# Altium PCB QUTMS_CMU_type2_v4.PcbDoc (part 2 of 2)
Units mm, origin at the board's own origin, x right, y up, seen from the top; angles counter-clockwise.
Board outline 198.55 x 64 mm, 4 copper layers (Top Layer, Signal Layer 1, Signal Layer 2, Bottom Layer), stack 0.778 mm thick; 180 components, 148 nets, 510 pads, 376 vias.
Unrouted connection lines stored in the file: 7.
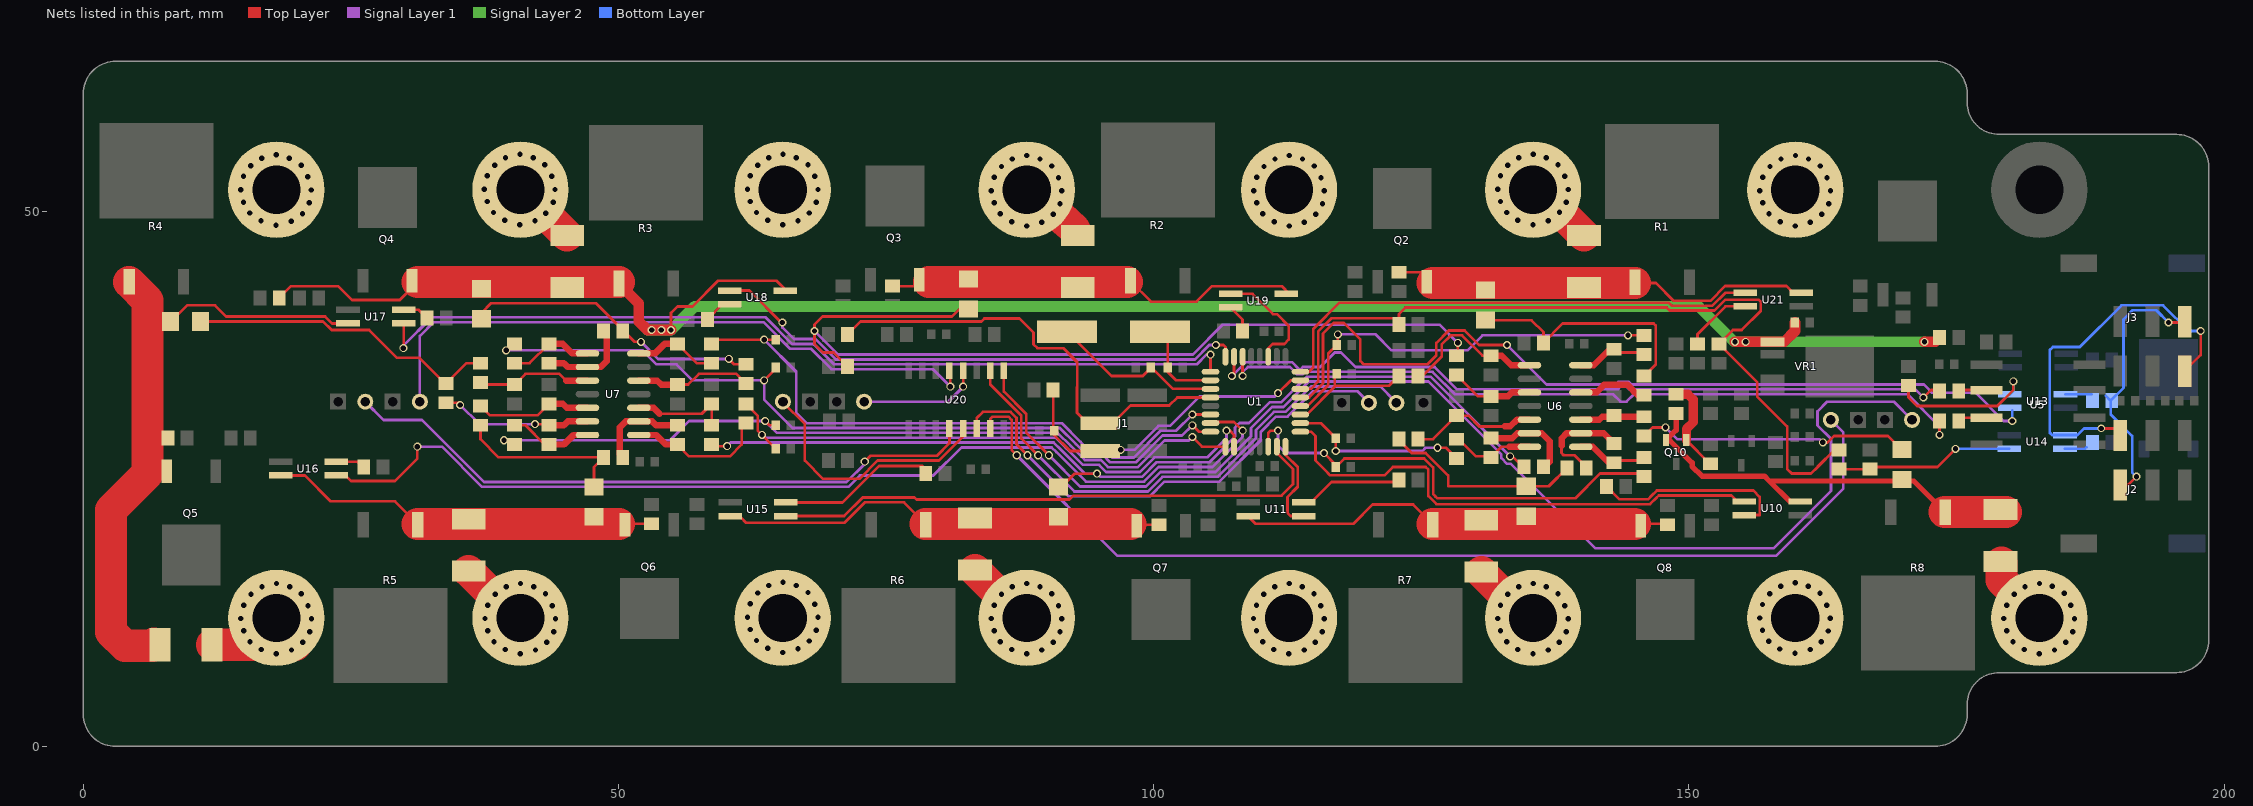
[diagram p4: the nets of this part, all layers, seen from the top]

## Via types
v1: diameter 0.8, hole 0.5, Top Layer to Bottom Layer, tented both sides, 253 vias
v2: diameter 0.75, hole 0.5, Top Layer to Bottom Layer, tented both sides, 122 vias
v3: diameter 0.7, hole 0.5, Top Layer to Bottom Layer, tented both sides, 1 vias

## Nets (pads, with @x,y where several pads share a name; then routed paths per layer and width w, separated by ;. In a path a pad name is that pad's centre, name@x,y a point inside that pad or via, vN(x,y) a via of type N, cw(c..) or ccw(c..) an arc to the next point about the centre after c; other vN are vias at no path point) (continued)
OPAMP-N4: R37.1 R46.2 U7.9 | length 8.7
  Top Layer w0.6: R37.1@43.5,35.8 44.9,35.8 45.26,35.44 U7.9@47.1,35.44 48.34,35.44 48.9,36 48.9,38.5 R46.2@48.6,38.8
OPAMP-N5: R36.1 R45.2 U7.13 | length 14.1
  Top Layer w0.254: R45.2@33.9,32.1 35,32.1 v2(35.2,31.9) ; v2(42.2,30.1) R36.1@43.4,30.1
  Top Layer w0.6: R36.1@43.5,30 44.9,30 45.26,30.36 U7.13@47.1,30.36
  Signal Layer 1 w0.254: v2(35.2,31.9) 37,30.1 v2(42.2,30.1)
OPAMP-N6: R35.1 R44.2 U7.2 | length 8.7
  Top Layer w0.6: R44.2@50.4,27 50.1,27.3 50.1,29.8 50.66,30.36 U7.2@51.9,30.36 53.14,30.36 53.5,30 R35.1@55.5,30
OPAMP-N7: R34.1 R43.2 U6.13 | length 8.7
  Top Layer w0.6: R34.1@131.51,28.79 133.49,28.79 133.96,29.26 U6.13@135.1,29.26 136.24,29.26 137,28.5 137,26.6 R43.2@136.4,26
OPAMP-N8: R33.1 R42.2 U6.2 | length 9.8
  Top Layer w0.254: 138.1,28.1 138.1,27.4 138.3,27.2 139.3,27.2 140.4,26.1 R42.2@140.4,26
  Top Layer w0.6: 138.1,28.1 138.1,28.8 138.56,29.26 139.9,29.26 142.04,29.26 R33.1@143,28.3
OPAMP-OUT1: R40.2 R77.1 U6.7 | length 6.7
  Top Layer w0.254: R40.2@143,37.1 143.3,36.8 145.6,36.8 R77.1@145.8,36.6
  Top Layer w0.6: U6.7@139.9,35.61 141.11,35.61 142.6,37.1 R40.2@143,37.1
OPAMP-OUT2: R39.2 R76.1 U6.8 | length 13.8
  Top Layer w0.254: R76.1@124.7,34.6 125.1,34.6 126.9,36.4 126.9,37.558 127.744,38.402 128.798,38.402 130.7,36.5 R39.2@131.5,36.5
  Top Layer w0.6: R39.2@131.5,36.5 132.5,36.5 133.39,35.61 U6.8@135.1,35.61
OPAMP-OUT3: R38.2 R75.1 U7.7 | length 7.9
  Top Layer w0.254: R38.2@55.5,37.6 57.3,35.8 R75.1@58.7,35.8
  Top Layer w0.6: U7.7@51.9,36.71 53.41,36.71 54.3,37.6 R38.2@55.5,37.6
OPAMP-OUT4: R37.2 R74.1 U7.8 | length 7.9
  Top Layer w0.254: R74.1@40.3,35.8 41.7,35.8 R37.2@43.5,37.6
  Top Layer w0.6: R37.2@43.5,37.6 44.8,37.6 45.69,36.71 U7.8@47.1,36.71
OPAMP-OUT5: R36.2 R73.1 U7.14 | length 7.9
  Top Layer w0.254: R73.1@40.3,30 41.3,30 43.1,28.2 R36.2@43.5,28.2
  Top Layer w0.6: R36.2@43.5,28.2 44.9,28.2 45.79,29.09 U7.14@47.1,29.09
OPAMP-OUT6: R35.2 R72.1 U7.1 | length 12.9
  Top Layer w0.254: R35.2@55.5,28.2 56.6,27.1 60.4,27.1 61.5,28.2 R72.1@61.5,30.2
  Top Layer w0.6: U7.1@51.9,29.09 53.51,29.09 54.4,28.2 R35.2@55.5,28.2
OPAMP-OUT7: R34.2 R71.1 U6.14 | length 8.1
  Top Layer w0.254: R71.1@128.3,28.9 130.1,27.1 R34.2@131.6,27.1 ; R34.2@131.5,27 R34.2@131.6,27.1 ; 133.2,27.99 132.49,27.99 R34.2@131.6,27.1
  Top Layer w0.6: 133.2,27.99 U6.14@135.1,27.99
OPAMP-OUT8: R33.2 R70.1 U6.1 | length 6.8
  Top Layer w0.254: R33.2@143,26.5 R33.2@143.3,26.8 ; R33.2@143.5,26.7 145.8,26.7 R70.1@145.6,26.8
  Top Layer w0.6: U6.1@139.9,27.99 141.01,27.99 142.7,26.3 142.8,26.3 R33.2@143,26.5
OPAMP-P1: R24.2 U6.5 | length 6.6
  Top Layer w0.6: U6.5@139.9,33.07 141.37,33.07 141.8,33.5 141.8,33.507 142.093,33.8 144.234,33.8 144.767,33.268 144.767,33.233 145.2,32.8 R24.2@145.8,32.8
OPAMP-P2: R23.2 R31.1 U6.10 | length 7.8
  Top Layer w0.254: R23.2@128.3,34.7 130.3,32.7 R31.1@131.5,32.7
  Top Layer w0.6: R31.1@131.5,32.7 133.1,32.7 133.47,33.07 U6.10@135.1,33.07
OPAMP-P3: R22.2 R30.1 U7.5 | length 10.9
  Top Layer w0.254: R30.1@55.5,33.8 56.5,33.8 57.5,34.8 61,34.8 R22.2@61.9,33.9
  Top Layer w0.6: U7.5@51.9,34.17 53.63,34.17 54,33.8 R30.1@55.5,33.8
OPAMP-P4: R21.2 R29.1 U7.10 | length 10.5
  Top Layer w0.254: R21.2@37.3,33.8 R29.1@40.3,33.8 41.3,34.8 44.47,34.8 45.1,34.17
  Top Layer w0.6: 45.1,34.17 U7.10@47.1,34.17
OPAMP-P5: R20.2 R28.1 U7.12 | length 11
  Top Layer w0.254: R20.2@37.1,31.8 37.973,30.927 42.427,30.927 R28.1@43.5,32
  Top Layer w0.6: R28.1@43.5,32 44.8,32 45.17,31.63 U7.12@47.1,31.63
OPAMP-P6: R19.2 R27.1 U7.3 | length 9.4
  Top Layer w0.254: 53.827,31.073 57.773,31.073 R27.1@58.7,32 R19.2@58.7,30
  Top Layer w0.6: U7.3@51.9,31.63 53.27,31.63 53.827,31.073
OPAMP-P7: R18.2 R26.1 U6.12 | length 12
  Top Layer w0.254: R18.2@124.7,28.7 126.1,28.7 R26.1@128.3,30.9 129.4,30.9 130.405,29.895 132.795,29.895
  Top Layer w0.6: 132.795,29.895 133.295,29.895 133.93,30.53 U6.12@135.1,30.53
OPAMP-P8: R17.2 R25.1 U6.3 | length 6
  Top Layer w0.6: U6.3@139.9,30.53 141.63,30.53 141.9,30.8 R17.2@145.8,30.8
OPTO-IN1: U1.32 U21.1 | length 47
  Top Layer w0.254: U1.32@113.7,35 114.5,35 114.9,35.4 114.9,39 117.354,41.454 148.104,41.454 148.389,41.169 152.185,41.169 153.397,42.381 U21.1@155.275,42.381
OPTO-IN2: U1.3 U19.1 | length 11
  Top Layer w0.254: U19.1@107.175,42.281 109.242,42.281 111.139,40.384 111.516,40.384 112.6,39.3 112.6,38 112.2,37.6 111.1,37.6 110.7,37.2 U1.3@110.7,36.4
OPTO-IN3: U1.8 U18.1 | length 51.6
  Top Layer w0.254: U18.1@59.481,42.581 U18.1@60.375,42.581 62.219,42.581 v2@65.2,39.6 ; v2(105.8,37.5) 106.5,37.5 106.7,37.3 U1.8@106.7,36.4
  Signal Layer 1 w0.254: v2(65.3,39.6) 65.3,39.142 66.388,38.055 68.373,38.055 68.453,37.975 68.483,37.975 70.304,36.154 103.838,36.154 105.184,37.5 v2(105.8,37.5)
OPTO-IN4: U1.9 U17.1 | length 82.8
  Top Layer w0.254: v2@29.925,37.225 U17.1@29.925,39.519 ; U1.9@105.3,35 v2(105.3,36.6)
  Signal Layer 1 w0.254: v2(29.9,37.2) 29.9,37.442 32.548,40.09 63.71,40.09 66.199,37.601 68.185,37.601 68.265,37.521 68.295,37.521 70.116,35.7 104.026,35.7 104.926,36.6 v2(105.3,36.6)
OPTO-IN5: U1.15 U16.1 | length 96.9
  Top Layer w0.254: U16.1@23.625,25.319 24.481,25.319 25,24.8 29.1,24.8 31.2,26.9 v2(31.2,28) ; U1.15@105.3,30.3 107.5,30.3 v2(108.3,29.5)
  Signal Layer 1 w0.254: v2(31.2,28) 33.5,28 37.254,24.246 71.488,24.246 72.542,25.3 79.4,25.3 82.03,27.93 90.463,27.93 90.902,27.491 90.902,27.488 93.662,24.728 99.08,24.728 100.444,26.092 105.492,26.092 108.3,28.9 v2(108.3,29.5)
OPTO-IN6: U1.23 U15.1 | length 53.7
  Top Layer w0.254: U15.1@64.781,21.519 U15.1@65.625,21.519 71.077,21.519 72.812,23.254 77.646,23.254 77.827,23.073 92.135,23.073 92.489,23.427 111.927,23.427 113,24.5 113,25.899 111.5,27.399 U1.23@111.5,28
OPTO-IN7: U1.24 U11.1 | length 8.7
  Top Layer w0.254: U1.24@112.3,28 112.3,27.241 113.454,26.087 113.454,24.254 112.5,23.3 112.5,21.8 112.781,21.519 U11.1@114.025,21.519
OPTO-IN8: U1.25 U10.1 | length 48.3
  Top Layer w0.254: U1.25@113.7,29.4 114.7,29.4 115.1,29 115.1,26.7 116.273,25.527 116.273,25.515 116.465,25.323 121.561,25.323 122.338,26.1 125.4,26.1 125.646,25.854 125.646,23.386 ; 125.646,23.375 126.393,22.627 146.369,22.627 146.973,23.231 146.973,23.235 147.184,23.446 153.954,23.446 154.519,22.881 U10.1@155.175,22.881
OPTO-OUT1: R9.2 U21.2 | length 6.5
  Top Layer w0.254: R9.2@150.8,37.6 150.8,38.5 153.411,41.111 U21.2@155.275,41.111
OPTO-OUT2: R10.2 U19.2 | length 2.7
  Top Layer w0.254: U19.2@107.175,41.011 108.3,39.886 R10.2@108.3,38.8
OPTO-OUT3: R11.2 U18.2 | length 2
  Top Layer w0.254: R11.2@58.3,39.9 U18.2@59.711,41.311
OPTO-OUT4: R12.2 U17.2 | length 2.5
  Top Layer w0.254: U17.2@29.925,40.789 31.311,40.789 R12.2@32.1,40
OPTO-OUT5: R13.2 U16.2 | length 2.8
  Top Layer w0.254: U16.2@23.625,26.589 25.611,26.589 R13.2@26.2,26
OPTO-OUT6: R14.2 U15.2 | length 14.6
  Top Layer w0.254: U15.2@65.625,22.789 70.931,22.789 74.342,26.2 78.4,26.2 R14.2@78.7,25.9
OPTO-OUT7: R15.2 U11.2 | length 9.7
  Top Layer w0.254: U11.2@114.025,22.789 114.689,22.789 116.6,24.7 122.7,24.7 R15.2@122.9,24.9
OPTO-OUT8: R16.2 U10.2 | length 18.5
  Top Layer w0.254: R16.2@142.3,24.3 143.519,23.081 146.181,23.081 146.519,23.419 146.519,23.423 146.996,23.9 156.018,23.9 156.602,23.316 156.602,21.613 ; U10.2@155.175,21.611 156.602,21.611
P_GATE: Q10.1 R96.2 R97.2 | length 9
  Top Layer w0.254: Q10.1@149.75,28.6 151.95,26.4 R97.2@152,26.4
  Top Layer w0.85: R96.2@148.8,32.9 149.9,32.9 150.4,32.4 150.4,30.3 149.75,29.65 Q10.1@149.75,28.6
PSEG_1: F1.2 F9.1 Q2.3 R1.1 R49.1 U21.4 | length 39.5
  Top Layer w0.254: R49.1@122.9,44.3 125.06,44.3 126.065,43.295 ; R1.1@144.96,43.3 146.9,43.3 148.577,41.623 151.997,41.623 153.382,43.008 159.092,43.008 159.719,42.381 U21.4@160.475,42.381
  Top Layer w3: 126.065,43.295 R1.1@144.955,43.295
PSEG_2: F2.2 F10.1 Q3.3 R2.1 R32.1 U19.4 | length 38.3
  Top Layer w0.254: R32.1@75.6,43 78.245,43 78.69,43.445 ; R2.1@97.835,43.445 99.734,41.546 104.005,41.546 105.458,43 111.956,43 U19.4@112.675,42.281
  Top Layer w3: 79,43.4 R2.1@97.49,43.4
PSEG_3: C99.2 F3.2 F11.1 Q4.3 R3.1 R58.2 R60.2 U18.4 VR1.1 | length 185
  Top Layer w0.254: R58.2@18.3,41.9 19.4,43 23.8,43 25.107,41.693 29.563,41.693 31.24,43.37 ; v2(54.9,38.9) 54.9,40.5 55.5,41.1 56.9,41.1 59.3,43.5 64.762,43.5 U18.4@65.681,42.581
  Top Layer w1: R3.1@50.035,43.245 51.9,41.38 51.9,39.7 52.7,38.9 v2(54.9,38.9) ; v2(154.3,37.8) v2(155.3,37.8) 158.9,37.8 159.9,38.8 C99.2@159.9,39.6 ; v2(172,37.8) 173,37.8 R60.2@173.4,38.2
  Top Layer w3: 31.24,43.37 43.53,43.37 R3.1@50.035,43.37
  Signal Layer 2 w1: 52.7,38.9 v2(54.9,38.9) 57.1,41.1 150.9,41.1 154.2,37.8 v2(154.3,37.8) v2(155.3,37.8) v2(172,37.8)
  other v2: 53.1,38.9 54,38.9
PSEG_4: F4.2 F12.1 Q5.3 R4.1 R59.1 U17.4 | length 57.3
  Top Layer w0.254: F4.2@8.2,39.7 9.7,41.2 12.3,41.2 13.346,40.154 22.588,40.154 23.242,39.5 U17.4@24.744,39.5
  Top Layer w3: R4.1@4.285,43.37 6,41.655 6,25.5 2.6,22.1 2.6,10.7 3.9,9.4 6.4,9.4 F12.1@6.6,9.6
PSEG_5: F5.2 F13.1 Q6.3 R5.1 R83.1 U16.4 | length 37.1
  Top Layer w0.254: U16.4@17.925,25.3 20.7,25.3 23.1,22.9 23.092,22.892 29.118,22.892 R5.1@31.24,20.77 ; 50.035,20.77 50.065,20.8 R83.1@53.1,20.8
  Top Layer w3: R5.1@31.24,20.77 50.035,20.77
PSEG_6: F6.2 F14.1 Q7.3 R6.1 R84.1 U15.4 | length 41.3
  Top Layer w0.254: U15.4@61.025,21.419 61.381,21.419 61.908,20.892 71.092,20.892 73,22.8 76.66,22.8 R6.1@78.69,20.77 ; Q7.3@97.905,20.7 R84.1@100.5,20.7
  Top Layer w3: R6.1@78.69,20.77 97.835,20.77
PSEG_7: F7.2 F15.1 Q8.3 R7.1 R85.1 U11.4 | length 41
  Top Layer w0.254: U11.4@108.803,21.497 109.5,20.8 118.653,20.8 120.453,22.6 124.235,22.6 R7.1@126.065,20.77 ; 144.935,20.8 R85.1@148,20.8
  Top Layer w3: R7.1@126.065,20.77 144.935,20.77
PSEG_8: F8.2 F16.1 Q10.2 R8.1 R96.1 U10.4 | length 41.3
  Top Layer w0.5: R96.1@148.8,31.1 148.8,29.55 147.85,28.6 148.189,28.6 150.3,26.489 150.3,26.164 151.214,25.25 157.05,25.25 157.5,24.8 ; U10.4@160.375,22.881 159.419,22.881 157.5,24.8 ; R8.1@173.896,21.904 171,24.8 157.5,24.8
  Top Layer w3: R8.1@173.896,21.904 179.099,21.904 F16.1@179.6,21.902
PTRACE1: F1.1 R24.1 R48.1 | length 23.3
  Top Layer w0.254: F1.1@131,39.8 135.3,39.8 136.4,38.7 R48.1@136.4,37.7 138.2,39.5 146.7,39.5 146.9,39.3 146.9,35.7 R24.1@145.8,34.6
PTRACE2: F2.1 R23.1 R47.1 | length 84.8
  Top Layer w0.254: R47.1@71.4,35.5 70.1,36.8 69.1,36.8 68.3,37.6 68.3,39.4 69.054,40.154 81.154,40.154 81.85,40.85 F2.1@82.7,40.85 ; R23.1@128.2,36.6 128.4,36.8 v2(128.4,37.7)
  Signal Layer 1 w0.254: v2(68.3,38.8) 70.492,36.608 103.65,36.608 106.442,39.4 126.7,39.4 v2(128.4,37.7)
PTRACE3: F3.1 R22.1 R46.1 | length 27.4
  Top Layer w0.254: F3.1@37.2,40.5 38.1,41.4 47.9,41.4 51.5,37.8 v2(52.1,37.8) ; v2(60.3,36.2) 60.8,35.7 R22.1@61.9,35.7
  Signal Layer 1 w0.254: v2(52.1,37.8) 53.7,36.2 v2(60.3,36.2)
PTRACE4: F4.1 R21.1 R45.1 | length 28.9
  Top Layer w0.254: F4.1@11,39.7 22.4,39.7 23.208,38.892 26.708,38.892 29.3,36.3 31.4,36.3 R45.1@33.6,34.1 ; R45.1@33.9,33.9 35.8,35.8 R21.1@37.1,35.8
PTRACE5: F5.1 R20.1 R44.1 | length 16.9
  Top Layer w0.254: R20.1@37.1,30 37.1,28.7 38.8,27 R44.1@48.6,27 47.7,26.1 47.7,24.3 F5.1@47.9,24.1
PTRACE6: F6.1 R19.1 R43.1 | length 89.3
  Top Layer w0.254: R19.1@58.854,28.046 v2(60.146,28.046) ; F6.1@91.1,24.2 91.336,24.2 92.618,25.482 v2(94.703,25.482) ; v2(133.3,27.1) 133.5,27.1 R43.1@134.6,26
  Signal Layer 1 w0.254: v2(60.146,28.046) 60.484,28.384 90.651,28.384 91.356,27.679 91.356,27.676 93.55,25.482 94.718,25.482 95.018,25.182 98.892,25.182 100.256,26.546 105.188,26.546 107.598,28.956 107.598,29.791 108.009,30.202 108.902,30.202 110.862,32.162 111.92,32.162 114.058,34.3 114.066,34.3 114.305,34.539 125.861,34.539 v2(133.3,27.1)
PTRACE7: F7.1 R18.1 R42.1 | length 19.1
  Top Layer w0.254: R18.1@122.9,28.6 124.1,27.4 125.4,27.4 127.5,25.3 127.5,24.3 136.9,24.3 R42.1@138.6,26 ; R18.1@122.9,28.9 R18.1@122.9,29.2
PTRACE8: F8.1 R17.1 | length 25.8
  Top Layer w0.254: R17.1@145.8,29 146.6,29.8 v2(147.8,29.8) ; v2(162.5,28.4) 162.938,28.4 163.538,29 168.6,29 F8.1@169.9,27.7
  Signal Layer 1 w0.254: v2@147.8,29.798 148.898,28.7 162.2,28.7 v2(162.5,28.4)
RESET: C22.2 J1.5 R98.1 U1.31 | length 28.7
  Top Layer w0.254: R98.1@90.6,33.3 90.6,29.2 92.2,27.6 J1.5@95,27.6 ; v2(111.6,33) 112.8,34.2 U1.31@113.7,34.2
  Signal Layer 1 w0.254: v2(96.9,27.7) 98.2,27.7 100.444,29.944 101.528,29.944 104.276,32.692 111.292,32.692 v2(111.6,33)
RX_CAN1: R66.2 U1.7 | length 71.6
  Top Layer w0.254: v2(107.3,34.6) 107.5,34.8 U1.7@107.5,36.4 ; v2(171.9,32.6) 172.6,33.3 R66.2@173.3,33.3
  Signal Layer 1 w0.254: v2(107.3,34.6) 108.6,35.9 112.9,35.9 113.592,35.208 113.69,35.208 113.929,35.447 115.554,35.447 116.909,36.802 117.491,36.802 118.846,35.447 126.237,35.447 128.33,33.354 143.348,33.354 143.601,33.607 144.182,33.607 144.436,33.354 171.146,33.354 v2(171.9,32.6)
RX_CAN2: R66.1 U5.2 | length 2.7
  Top Layer w0.254: R66.1@175.1,33.3 U5.2@177.755,33.3
SCK: J1.3 R80.1 U1.12 | length 42.1
  Top Layer w0.254: R80.1@71.4,38.5 72.6,39.7 83.895,39.7 84.177,39.981 87.461,39.981 88.773,38.669 88.773,37.565 89.138,37.2 91.542,37.2 92.854,35.888 92.854,33.591 92.833,33.57 92.833,31.167 93.8,30.2 J1.3@95,30.2 ; J1.3@95.962,29.962 97.838,31.838 101.438,31.838 102.2,32.6 U1.12@105.3,32.6
SEG_1: F9.2 pad.@135.435,52 pad.@159.935,52 | length 6
  Top Layer w3: pad.@135.925,52 F9.2@140.2,47.725
  other v1: 159.925,48.62 135.425,48.745 161.345,48.975 158.52,49.025 136.845,49.1 134.02,49.15 162.395,49.7 157.47,49.75 132.97,49.875 137.9,49.9 163.045,50.7 156.895,50.775 138.545,50.825 132.395,50.9 163.214,51.903 156.62,51.925 138.714,52.028 132.12,52.05 162.895,53.125 156.895,53.175 138.395,53.25 132.395,53.3 157.57,54.175 162.27,54.225 133.07,54.3 137.77,54.35 158.595,54.875 161.17,54.875 134.095,55 136.67,55 159.945,55.2 135.445,55.325
SEG_2: F10.2 pad.@88.135,52 pad.@112.635,52 | length 10.9
  Top Layer w3: pad.@88.625,52 92.6,48.3 90.598,50.027 90.585,50.04 pad.@88.625,52
  other v1: 88.125,48.62 112.65,48.62 89.545,48.975 114.07,48.975 86.72,49.025 111.245,49.025 90.62,49.7 115.12,49.7 85.67,49.75 110.195,49.75 91.245,50.7 115.77,50.7 85.095,50.775 109.62,50.775 91.414,51.903 115.939,51.903 84.82,51.925 109.345,51.925 91.095,53.125 115.62,53.125 85.095,53.175 109.62,53.175 85.77,54.175 110.295,54.175 90.47,54.225 114.995,54.225 86.795,54.875 89.37,54.875 111.32,54.875 113.895,54.875 88.145,55.2 112.67,55.2
SEG_3: F11.2 pad.@40.835,52 pad.@65.335,52 | length 6
  Top Layer w3: pad.@40.925,52 F11.2@45.2,47.725
  other v1: 40.775,48.745 65.35,48.745 42.195,49.1 66.77,49.1 39.37,49.15 63.945,49.15 43.2,49.8 67.82,49.825 38.32,49.875 62.895,49.875 43.895,50.825 68.47,50.825 37.745,50.9 62.32,50.9 44.064,52.028 68.639,52.028 37.47,52.05 62.045,52.05 43.745,53.25 68.32,53.25 37.745,53.3 62.32,53.3 38.42,54.3 62.995,54.3 43.12,54.35 67.695,54.35 39.445,55 42.02,55 64.02,55 66.595,55 40.795,55.325 65.37,55.325
SEG_4: F12.2 pad.@18.035,12 pad.@18.035,52 | length 11.3
  Top Layer w3: F12.2@12.025,9.5 19.8,9.5 pad.@17.3,12
  other v1: 18.025,8.645 19.445,9 16.62,9.05 20.495,9.725 15.57,9.775 21.145,10.725 14.995,10.8 21.314,11.928 14.72,11.95 20.995,13.15 14.995,13.2 15.67,14.2 20.37,14.25 16.695,14.9 19.27,14.9 18.045,15.225 18,48.695 19.42,49.05 16.595,49.1 20.47,49.775 15.545,49.825 21.12,50.775 14.97,50.85 21.289,51.978 14.695,52 20.97,53.2 14.97,53.25 15.645,54.25 20.345,54.3 16.67,54.95 19.245,54.95 18.02,55.275
SEG_5: F13.2 pad.@40.835,12 pad.@65.335,12 | length 6.2
  Top Layer w3: F13.2@36,16.375 pad.@40.375,12
  other v1: 40.825,8.645 65.35,8.77 42.245,9 39.42,9.05 66.77,9.125 63.945,9.175 43.295,9.725 38.37,9.775 67.82,9.85 62.895,9.9 43.945,10.725 37.795,10.8 68.47,10.85 62.32,10.925 44.114,11.928 37.52,11.95 68.639,12.053 62.045,12.075 43.795,13.15 37.795,13.2 68.32,13.275 62.32,13.325 38.47,14.2 43.17,14.25 62.995,14.325 67.695,14.375 39.495,14.9 42.07,14.9 64.02,15.025 66.595,15.025 40.845,15.225 65.37,15.35
SEG_6: F14.2 pad.@88.135,12 pad.@112.635,12 | length 6.3
  Top Layer w3: F14.2@83.3,16.475 pad.@87.775,12
  other v1: 88.125,8.645 112.625,8.645 89.545,9 114.045,9 86.72,9.05 111.22,9.05 90.595,9.725 115.095,9.725 85.67,9.775 110.17,9.775 91.245,10.725 115.745,10.725 85.095,10.8 109.595,10.8 91.414,11.928 115.914,11.928 84.82,11.95 109.32,11.95 91.095,13.15 115.595,13.15 85.095,13.2 109.595,13.2 85.77,14.2 110.27,14.2 90.47,14.25 114.97,14.25 86.795,14.9 89.37,14.9 111.295,14.9 113.87,14.9 88.145,15.225 112.645,15.225
SEG_7: F15.2 pad.@135.435,12 pad.@159.935,12 | length 6.8
  Top Layer w3: F15.2@130.6,16.275 pad.@135.435,11.44
  other v1: 135.425,8.645 159.9,8.695 136.845,9 134.02,9.05 161.32,9.05 158.495,9.1 137.895,9.725 132.97,9.775 162.37,9.775 157.445,9.825 138.545,10.725 163.02,10.775 132.395,10.8 156.87,10.85 138.714,11.928 132.12,11.95 163.189,11.978 156.595,12 138.395,13.15 132.395,13.2 162.87,13.2 156.87,13.25 133.07,14.2 137.77,14.25 157.545,14.25 162.245,14.3 134.095,14.9 136.67,14.9 158.57,14.95 161.145,14.95 135.445,15.225 159.92,15.275
SEG_8: F16.2 pad.@182.735,12 | length 6.6
  Top Layer w3: F16.2@179.2,17.175 179.2,15.535 pad.@182.735,12
  other v1: 182.725,8.645 184.145,9 181.32,9.05 185.195,9.725 180.27,9.775 185.845,10.725 179.695,10.8 186.014,11.928 179.42,11.95 179.695,13.2 185.67,13.2 180.37,14.2 185.045,14.3 181.395,14.9 183.945,14.95 182.745,15.225
TH1: TH1.2 U20.1 | length 115.2
  Top Layer w0.254: U20.1@85.994,35.1 85.994,33.164 88.083,31.075 88.083,29.317 v2(90.2,27.2)
  Signal Layer 1 w0.254: v2(90.2,27.2) 93.126,24.274 99.268,24.274 100.632,25.638 105.754,25.638 109.09,28.974 109.09,29.748 111.05,31.708 112.108,31.708 114.246,33.846 114.254,33.846 114.493,34.085 125.673,34.085 132.475,27.283 132.475,26.933 133.009,26.398 133.36,26.398 141.258,18.5 157.9,18.5 163.26,23.86 163.26,28.74 162.002,29.998 162.002,31.302 162.9,32.2 169.14,32.2 TH1.2@170.84,30.5
TH2: TH2.2 U20.2 | length 50
  Top Layer w0.254: U20.2@84.724,35.1 84.724,33.792 87.629,30.887 87.629,28.771 v2(89.2,27.2)
  Signal Layer 1 w0.254: v2(89.2,27.2) 92.58,23.82 99.456,23.82 100.82,25.184 105.942,25.184 109.544,28.786 109.544,29.56 111.238,31.254 112.304,31.254 114.681,33.631 121.169,33.631 122.46,32.34 TH2.2@122.46,31.8
TH3: TH3.2 U20.4 | length 11.3
  Top Layer w0.254: v2(82.2,33.6) U20.4@82.2,35.1
  Signal Layer 1 w0.254: TH3.2@72.94,32.2 72.942,32.202 78.591,32.202 78.593,32.2 80.8,32.2 v2(82.2,33.6)
TH4: TH4.2 U20.5 | length 60.2
  Top Layer w0.254: v2(81,33.6) U20.5@81,35.014
  Signal Layer 1 w0.254: TH4.2@31.44,32.2 31.44,38.34 32.736,39.636 63.522,39.636 66.011,37.147 67.997,37.147 69.897,35.246 79.354,35.246 v2(81,33.6)
TH5: TH5.2 U20.12 | length 60.7
  Top Layer w0.254: v2(73,26.6) 73.554,27.154 79.737,27.154 80.914,28.331 U20.12@80.914,29.7
  Signal Layer 1 w0.254: TH5.2@26.34,32.2 28.04,30.5 31.642,30.5 37.442,24.7 71.3,24.7 73,26.4 v2(73,26.6)
TH6: TH6.2 U20.13 | length 24.2
  Top Layer w0.254: TH6.2@65.36,32.14 67.4,30.1 67.4,26.7 69.1,25 72.5,25 74.2,26.7 79.925,26.7 82.184,28.959 U20.13@82.184,29.7
TH7: TH7.2 U20.14 | length 47.7
  Top Layer w0.254: U20.14@83.454,29.7 83.454,30.654 84.056,31.256 86.617,31.256 87.175,30.698 87.175,28.225 v2(88.2,27.2)
  Signal Layer 1 w0.254: v2(88.2,27.2) 92.034,23.366 99.644,23.366 101.008,24.73 106.13,24.73 109.998,28.598 109.998,29.372 111.426,30.8 112.492,30.8 114.869,33.177 119.023,33.177 119.9,32.3 TH7.2@119.9,31.8
TH8: TH8.2 U20.15 | length 97.2
  Top Layer w0.254: U20.15@84.724,29.7 84.724,30.574 84.952,30.802 86.429,30.802 86.721,30.51 86.721,27.679 v2(87.2,27.2)
  Signal Layer 1 w0.254: v2(87.2,27.2) 96.6,17.8 158.14,17.8 164.4,24.06 164.4,29.36 TH8.2@163.26,30.5
TX_CAN1: R65.2 U1.6 | length 72.9
  Top Layer w0.254: v2(108.3,34.6) U1.6@108.3,36.4 ; v2(173.4,29.1) R65.2@173.4,30.7
  Signal Layer 1 w0.254: v2(108.3,34.6) 108.3,34.958 108.788,35.446 112.712,35.446 113.404,34.754 113.878,34.754 114.117,34.993 126.049,34.993 128.142,32.9 142.904,32.9 143.601,32.203 144.182,32.203 144.879,32.9 170.4,32.9 173.4,29.9 v2(173.4,29.1)
TX_CAN2: R65.1 U5.3 | length 2.6
  Top Layer w0.254: R65.1@175.2,30.7 U5.3@177.785,30.7
VSENSE1: C8.2 R77.2 U1.28 | length 38.2
  Top Layer w0.254: U1.28@113.7,31.8 114.358,31.8 116.3,33.742 116.3,36.7 C8.2@117.1,37.5 ; C8.2@117.2,37.6 v2(117.2,38.5) ; v2(144.3,38.4) R77.2@145.8,38.4
  Signal Layer 1 w0.254: v2(117.2,38.5) 120.7,38.5 122.202,36.998 129.298,36.998 130.7,38.4 v2(144.3,38.4)
VSENSE2: C7.2 R76.2 U1.27 | length 11.9
  Top Layer w0.254: U1.27@113.7,31 114.301,31 116.9,33.599 116.9,34.6 C7.2@117.1,34.8 ; 116.9,33.7 122,33.7 R76.2@122.9,34.6
VSENSE3: C6.2 R75.2 U1.14 | length 56.2
  Top Layer w0.254: R75.2@58.7,37.6 59.1,38 C6.2@64.7,38 ; v2@103.7,31 U1.14@105.3,31
  Signal Layer 1 w0.254: v2(63.6,38) 66.6,35 66.6,31.162 67.562,30.2 91.403,30.2 93.172,28.431 93.172,28.428 93.936,27.664 95.44,27.664 96.106,26.998 98.14,26.998 100.632,29.49 102.09,29.49 v2(103.6,31)
VSENSE4: C5.2 R74.2 U1.16 | length 74.5
  Top Layer w0.254: v2(63.6,34.2) 64.7,35.3 C5.2@64.7,35.4 ; v2(103.6,30) 104.2,29.4 U1.16@105.3,29.4
  Signal Layer 1 w0.254: v2(39.5,37) 52.258,37 53.565,35.693 55.407,35.693 56.9,34.2 v2(63.6,34.2) 63.6,32.4 66.254,29.746 91.215,29.746 92.718,28.243 92.718,28.24 93.748,27.21 95.252,27.21 95.918,26.544 98.328,26.544 100.82,29.036 102.636,29.036 v2(103.6,30)
VSENSE5: C4.2 R73.2 U1.17 | length 72.6
  Top Layer w0.254: v2(63.7,30.4) 64.1,30 C4.2@64.7,30 ; v2(103.6,28.9) 104.5,28 U1.17@106.7,28
  Signal Layer 1 w0.254: v2(39.3,28.6) 39.302,28.602 53.091,28.602 53.093,28.6 54.8,28.6 56.6,30.4 v2(63.7,30.4) 64.808,29.292 91.027,29.292 92.264,28.055 92.264,28.052 93.56,26.756 95.064,26.756 95.73,26.09 98.516,26.09 101.008,28.582 103.282,28.582 v2(103.6,28.9)
VSENSE6: C3.2 R72.2 U1.18 | length 53.8
  Top Layer w0.254: R72.2@61.9,32 62.998,30.902 62.998,30.107 63,30.105 63,29.5 C3.2@64.7,27.8 ; v2(106.8,29.5) 107.1,29.5 107.5,29.1 U1.18@107.5,28
  Signal Layer 1 w0.254: v2@63.662,28.838 90.839,28.838 91.81,27.867 91.81,27.864 93.372,26.302 94.876,26.302 95.405,25.773 95.405,25.769 95.538,25.636 98.704,25.636 100.068,27 105,27 106.8,28.8 v2(106.8,29.5)
  other v2: 63.4,29.1
VSENSE7: C2.2 R71.2 U1.26 | length 16.9
  Top Layer w0.254: U1.26@113.7,30.2 115.6,30.2 C2.2@117,28.8 v2(117,27.6) ; v2(126.5,27.9) 127.3,27.9 R71.2@128.3,26.9
  Signal Layer 1 w0.254: v2(117,27.6) 125.1,27.6 125.4,27.9 v2(126.5,27.9)
VSENSE8: C1.2 R70.2 U1.22 | length 43.3
  Top Layer w0.254: U1.22@110.7,28 110.7,29.3 110.9,29.5 v2(111.6,29.5) ; v2(115.9,27.4) 117,26.3 C1.2@117,26.1 117.8,26.9 125.258,26.9 126.1,26.058 126.1,23.574 126.298,23.376 126.298,23.365 126.49,23.173 139.373,23.173 141.7,25.5 145.5,25.5 R70.2@145.8,25.2
  Signal Layer 1 w0.254: v2(111.6,29.5) 111.6,28.1 112.3,27.4 v2(115.9,27.4)
WAKE_IN_GLV1: J2.6 J3.6 U14.1 | length 36.3
  Top Layer w0.254: v3(188.5,29.7) 190,29.7 190.3,29.4 J2.6@190.3,29.05 ; J3.6@196.3,35.05 197.8,36.55 v2(197.8,38.8)
  Bottom Layer w0.254: v3(188.5,29.7) 186.9,29.7 186.281,29.081 U14.1@185.125,29.081 183.919,29.081 183.7,29.3 183.7,37.018 183.99,37.308 186.503,37.308 190.395,41.2 194.3,41.2 196.7,38.8 v2(197.8,38.8)
WAKE_IN_GLV2: R63.1 U14.2 | length 2.1
  Bottom Layer w0.254: U14.2@185.125,27.811 187.011,27.811 R63.1@187.15,27.95
WAKE_IN_HV1: D1.1 R64.2 R95b.1 U1.30 | length 76
  Top Layer w0.254: U1.30@113.7,33.4 114.674,33.4 115.354,34.08 115.354,38.754 116.6,40 122.9,40 122.9,40.4 123.5,41 147.916,41 148.201,40.715 152.373,40.715 153.396,41.738 156.51,41.738 156.702,41.546 156.702,40.676 154.926,38.9 154.1,38.9 R95b.1@152.8,37.6 156.373,34.027 156.373,32.685 159.173,29.885 159.173,25.923 159.6,25.496 161.408,25.496 162.027,26.115 162.027,26.127 163.6,27.7 R64.2@164,27.7
WAKE_IN_HV2: R64.1 R88.2 U14.3 | length 16.7
  Top Layer w0.254: R64.1@164,25.9 R88.2@166.9,25.9 167.1,26.1 173.2,26.1 v2(174.9,27.8)
  Bottom Layer w0.254: v2(174.9,27.8) 179.914,27.8 U14.3@179.925,27.811
WAKE_OUT_GLV1: R78.1 U13.3 | length 2.4
  Bottom Layer w0.254: U13.3@185.175,32.889 187.589,32.889 R78.1@187.6,32.9
WAKE_OUT_GLV2: J2.3 J3.3 R78.2 | length 25.2
  Top Layer w0.254: J2.3@190.3,24.42 191.02,24.42 v2(191.8,25.2) ; v2(194.8,39.6) 196.22,39.6 J3.3@196.3,39.68
  Bottom Layer w0.254: R78.2@188.941,32.745 189.4,32.285 189.4,31 191.4,29 191.4,25.6 v2(191.8,25.2) ; R78.2@189.4,32.3 190.6,33.5 190.6,39.9 191.446,40.746 193.654,40.746 v2(194.8,39.6)
WAKE_OUT_HV1: U1.29 U13.1 | length 81.6
  Top Layer w0.254: U1.29@113.7,32.6 114.516,32.6 115.808,33.892 115.808,38.566 116.788,39.546 117.766,39.546 119.3,38.012 119.3,36.693 119.298,36.691 119.298,36.002 119.602,35.698 125.556,35.698 126.4,36.542 126.4,37.7 127.556,38.856 129.044,38.856 130.4,37.5 v2(133,37.5)
  Signal Layer 1 w0.254: v2(133,37.5) 136.692,33.808 143.16,33.808 143.413,34.061 144.371,34.061 144.624,33.808 171.95,33.808 172.712,33.046 176.754,33.046 179.4,30.4 v2(180.2,30.4)
  Bottom Layer w0.254: v2(180.2,30.4) U13.1@180.2,31.394
WAKE_OUT_HV2: R69.2 U13.2 | length 13.9
  Top Layer w0.254: R69.2@170.5,33.6 170.5,32.6 171.3,31.8 178.8,31.8 180.3,33.3 v2(180.3,34.1)
  Bottom Layer w0.254: U13.2@179.975,32.889 180.3,33.214 v2(180.3,34.1)
XTAL1: C9.2 U1.10 Y1.1 | length 8.4
  Top Layer w0.254: Y1.1@100.6,38.75 101.3,38.05 101.3,35 102.1,34.2 U1.10@105.3,34.2
XTAL2: C10.2 U1.11 Y1.2 | length 16.2
  Top Layer w0.254: Y1.2@91.9,38.75 96.05,34.6 98.972,34.6 99.672,35.3 99.9,35.3 101.8,33.4 U1.11@105.3,33.4
pads on no net: J2.0 J3.0 VR1.4

## Polygon pours and split planes (outlines as drawn)
GND_CELL on Signal Layer 2 "Top Layer-No Net" (solid, pour order 8): 6,58 170,58 181,47 181,17 170,6 6,6
GND_GLV on Signal Layer 2 "Top Layer-No Net" (solid, pour order 6): 198.003,19 186,19 184,21 184,43 186,45 198.003,45

## Other copper
Top Layer:
  rectangle: 184.7,18.1 188.9,24.8
  rectangle: 184.7,18.1 198.2,21.7
  rectangle: 184.6,42.4 198.1,46
  rectangle: 184.6,39.3 188.8,46
  rectangle net HEAT1: 1.7,58 12.2,59.425
  rectangle net HEAT1: 47.2,57.7 57.9,59.125
  rectangle net HEAT1: 95,57.825 105.675,59.25
  rectangle net HEAT1: 142.1,57.075 152.9,61.65
  rectangle net HEAT2: 23.495,4.544 33.995,5.969
  rectangle net HEAT2: 70.907,4.671 81.407,6.096
  rectangle net HEAT2: 166.116,2.413 175.514,8.128
  rectangle net HEAT2: 118.278,4.798 128.778,6.223

## Silkscreen, mask and mechanical layers (free items; w line width, h text height)
Top Overlay:
  lines w0.13: 22.4,28.4 22.7,28.1 ; 22.7,30.6 22.7,28.1 ; 23,28.4 22.7,28.1 ; 32.1,36 32.4,36.3 ; 32.4,33.8 32.4,36.3 ; 32.7,36 32.4,36.3 ; 63.3,28.3 63.6,28 ; 63.6,30.5 63.6,28 ; 63.9,28.3 63.6,28 ; 72.9,34.9 72.9,36.5 72.9,37.7 73.7,38.5 ; 73.2,38.5 73.7,38.5 ; 73.7,38 73.7,38.5 ; 119,27.1 119.3,26.8 ; 119.3,29.3 119.3,26.8 ; 119.6,27.1 119.3,26.8 ; 125.8,33.8 125.8,36.3 125.8,37.1 126.8,38.1 ; 126.3,38.1 126.8,38.1 ; 126.8,37.6 126.8,38.1 ; 162.1,26.7 162.4,26.4 ; 162.4,28.9 162.4,26.4 ; 162.7,26.7 162.4,26.4 ; 168.6,32.2 168.6,34.7 168.6,36.9 169.8,38.1 ; 169.3,38.1 169.8,38.1 ; 169.8,37.6 169.8,38.1
  lines w0.5: 182.6,26.7 182.6,19.5 184.8,17.3 198,17.3 ; 182.6,37 182.6,44.8 184.7,46.9 198,46.9
  text "4" at 13.716,56.007 h0.8
  text "2" at 83.693,56.007 h0.8
  text "1" at 154.94,56.007 h0.8
  text "3" at 35.687,55.753 h0.8
  text "2" at 107.188,55.753 h0.8
  text "1" at 131.064,55.753 h0.8
  text "3" at 59.817,55.499 h0.8
  text "0" at 177.165,54.737 h0.8
  text "Cell_Management_Unit_Type2_v4_JM" at 1,46.4 h1 r270
  text "HV Isolation" at 182.2,37.3 h0.8 r90
  text "8" at 187.325,7.62 h0.8
  text "6" at 92.71,7.239 h0.8
  text "5" at 44.958,7.112 h0.8
  text "7" at 139.7,6.985 h0.8
  text "5" at 69.088,6.858 h0.8
  text "6" at 116.078,6.858 h0.8
  text "7" at 163.957,6.858 h0.8
  text "4" at 21.082,6.731 h0.8
Bottom Overlay:
  lines w0.5: 182.6,26.7 182.6,19.5 184.8,17.3 198,17.3 ; 182.6,37.8 182.6,44.8 184.7,46.9 198,46.9
Top Paste:
  lines w5: 2.85,2.7 173,2.7 ; 2.9,61.3 173.05,61.3
Top Solder:
  lines w5: 2.85,2.7 173,2.7 ; 2.9,61.3 173.05,61.3
Mechanical 1:
  lines w0.254: 198.55,9.895 cw(c195.55,9.895) 195.55,6.895 178.987,6.895 ccw(c178.987,3.895) 175.987,3.895 175.987,3 cw(c172.987,3) 172.987,0 3,0 cw(c3,3) 0,3 0,60.17 0,61 cw(c3,61) 3,64 172.987,64 cw(c172.987,61) 175.987,61 175.987,60.17 ccw(c178.987,60.17) 178.987,57.17 195.55,57.17 cw(c195.55,54.17) 198.55,54.17 198.55,9.904
Mechanical 15:
  drawing of 384 lines, arcs and shapes, not listed

## Text inside footprints (layer, text, board x,y; h text height)
J1: Top Overlay "1" at 92.1,32.4 h0.8